# Altium PCB GateWay V1.2.PcbDoc (part 3 of 3)
Units mil, origin at the board's own origin, x right, y up, seen from the top; angles counter-clockwise.
Board outline 3543.31 x 4133.86 mil, 2 copper layers (Top Layer, Bottom Layer); 169 components, 132 nets, 605 pads, 379 vias.
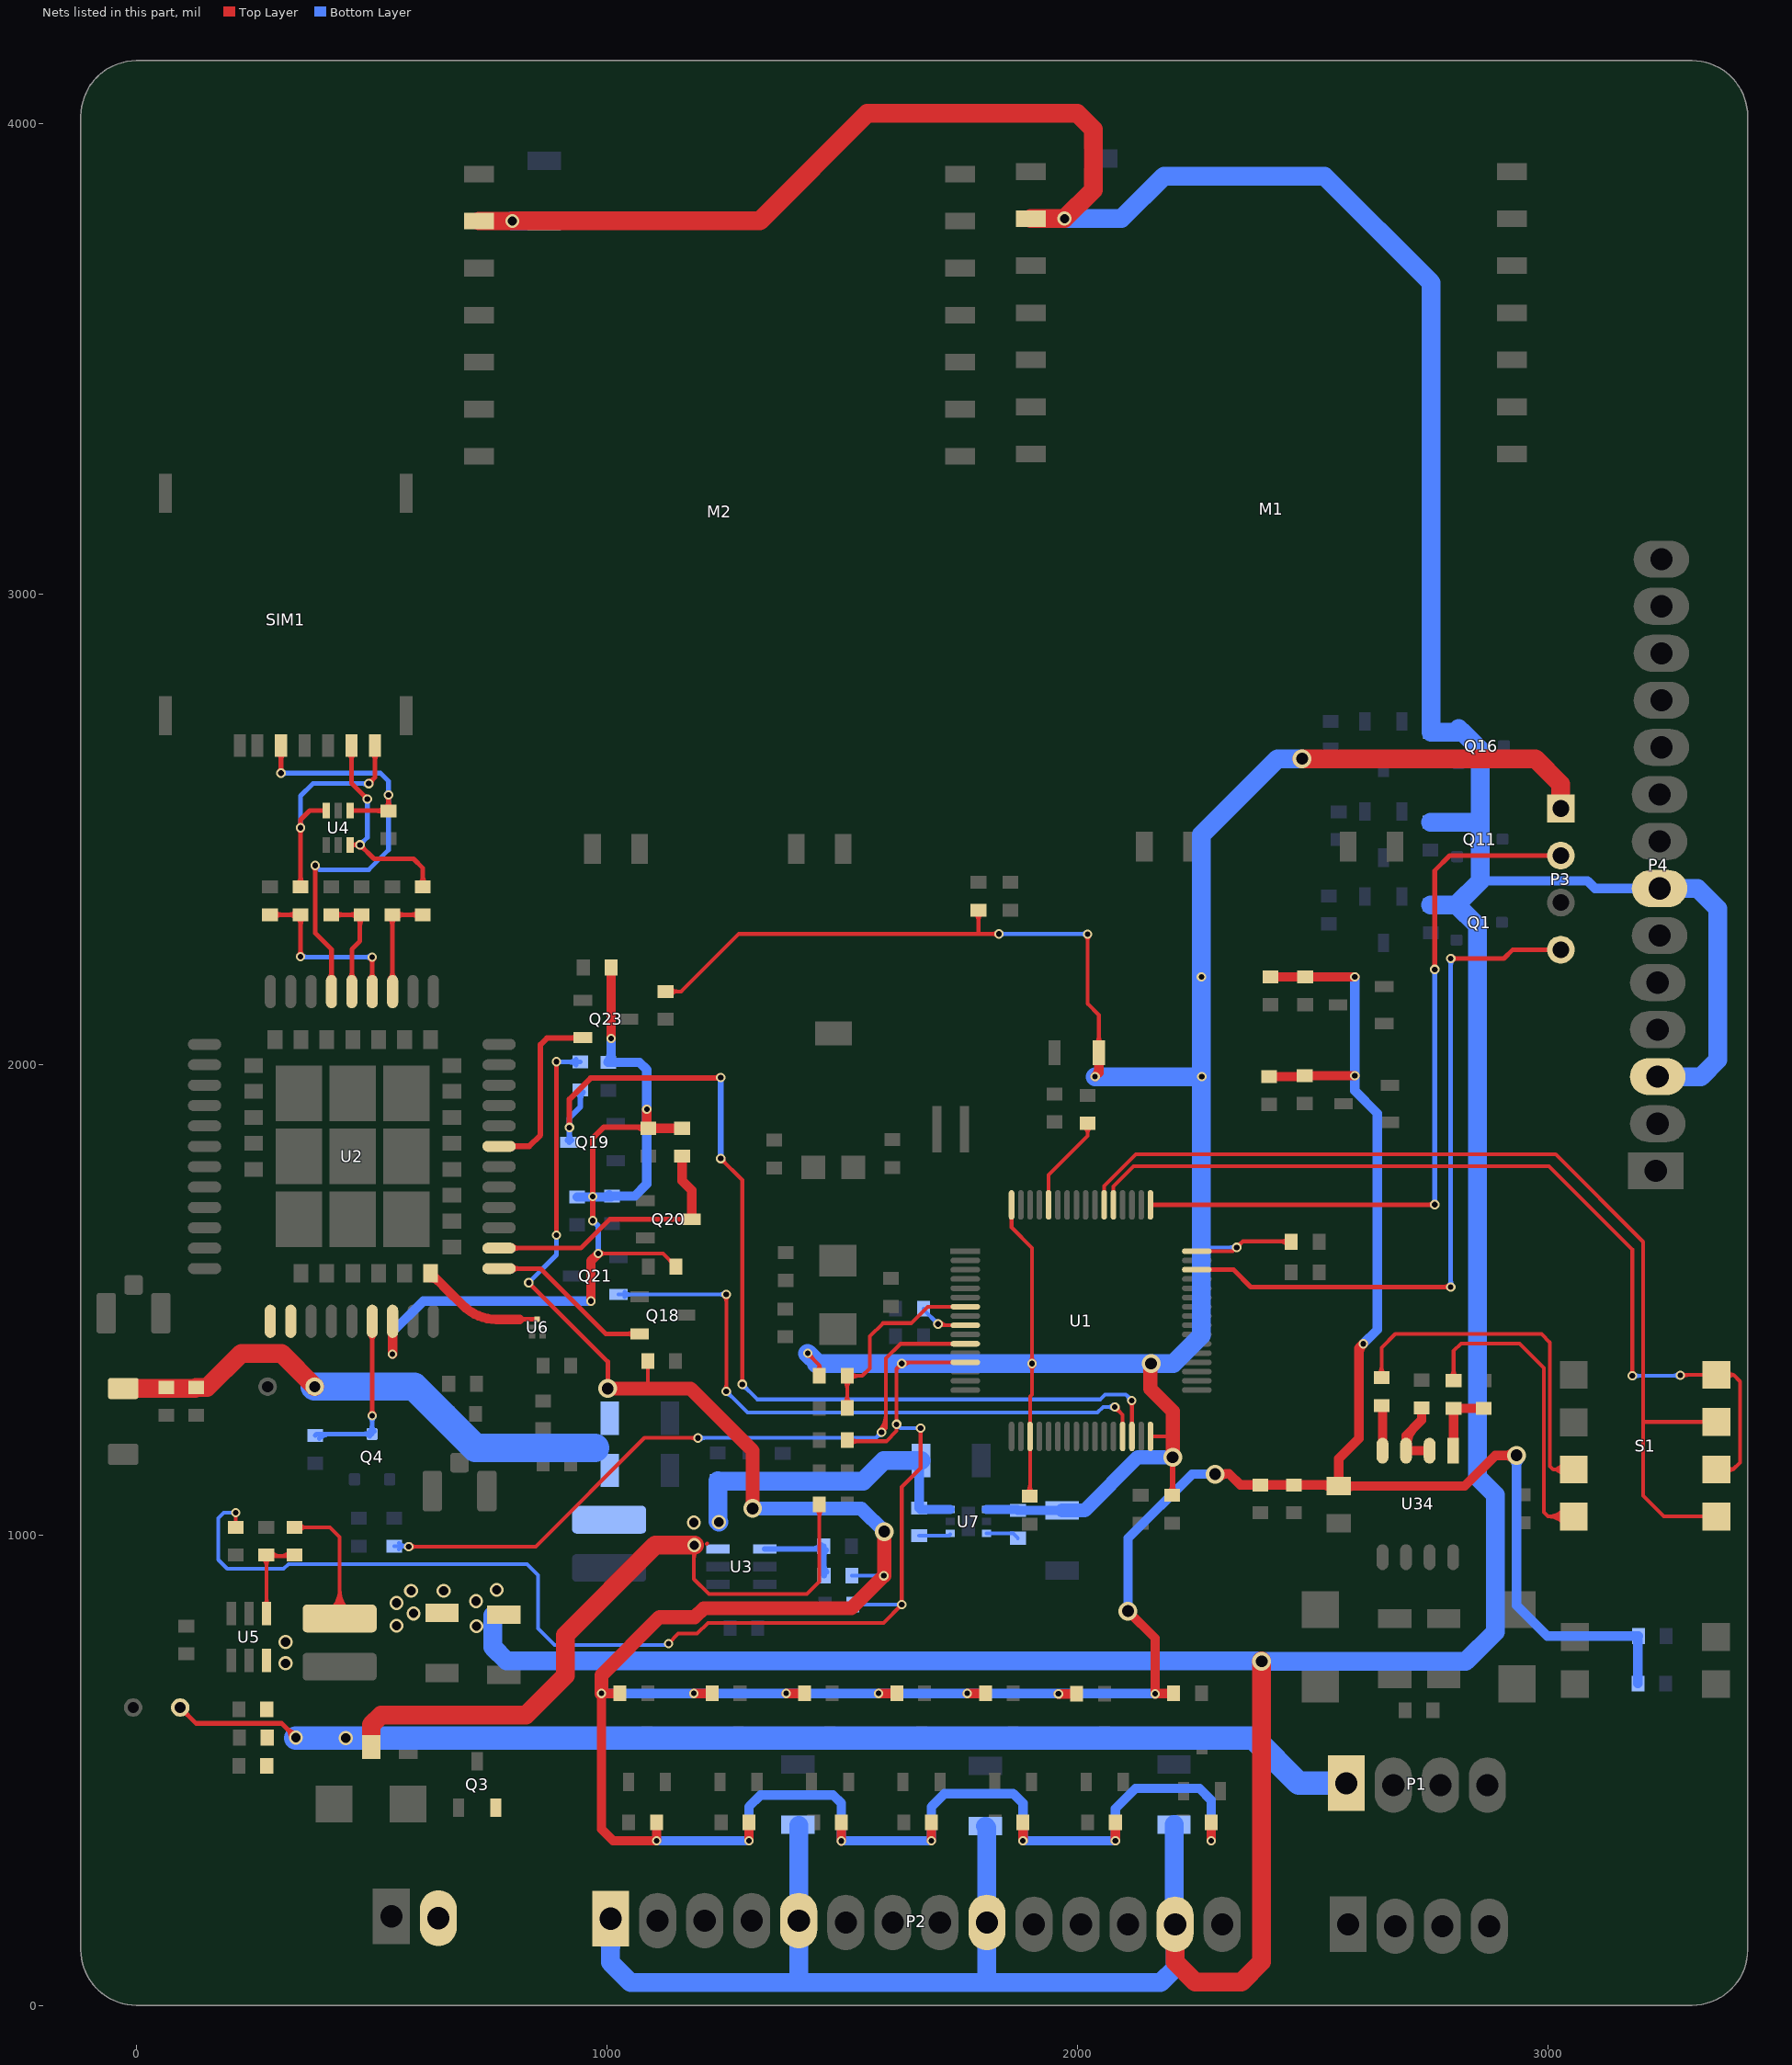
[diagram p3: the nets of this part, all layers, seen from the top]

## Via types
v1: diameter 30, hole 20, Top Layer to Bottom Layer, tented both sides, 218 vias
v2: diameter 20, hole 12, Top Layer to Bottom Layer, tented both sides, 151 vias
v3: diameter 40, hole 25, Top Layer to Bottom Layer, tented both sides, 10 vias

## Nets (pads, with @x,y where several pads share a name; then routed paths per layer and width w, separated by ;. In a path a pad name is that pad's centre, name@x,y a point inside that pad or via, vN(x,y) a via of type N, cw(c..) or ccw(c..) an arc to the next point about the centre after c; other vN are vias at no path point) (continued)
NetR25_2: R25.2 SIM1.7 U4.3 | length 604.2
  Top Layer w10: SIM1.7@451.89,2661.07 cw(c438.58,2647.76) 457.4,2647.76 cw(c476.22,2647.76) SIM1.7@462.91,2661.07 ; U4.3@454.57,2466.77 v2(475.23,2466.77) 505,2437 589,2437 608.98,2417.02 R25.2@608.98,2377.19 ; SIM1.7@457.4,2678 457.4,2597.6 v2(491,2564) ; v2@471.69,2463.24 ccw(c463.16,2454.7) 463.16,2466.77 ccw(c463.16,2478.84) v2@471.69,2470.31 ; v2@475.23,2461.77 cw(c475.23,2449.7) 483.76,2458.24 cw(c492.3,2466.77) v2@480.23,2466.77 ; v2@486,2564 ccw(c473.93,2564) 482.46,2572.54 ccw(c491,2581.07) v2@491,2569 ; R25.2@602.77,2383.4 ccw(c587.78,2398.38) 608.98,2398.38 ccw(c630.17,2398.38) R25.2@615.18,2383.4
  Bottom Layer w10: v2(475.23,2466.77) 491,2482.54 v2(491,2564) ; v2@475.23,2471.77 ccw(c475.23,2483.84) 483.76,2475.31 ccw(c492.3,2466.77) v2@480.23,2466.77 ; v2@487.46,2560.46 cw(c478.93,2551.93) 491,2551.93 cw(c503.07,2551.93) v2@494.54,2560.46
NetR29_2: R29.2 R48.2 U3.4 | length 273.4
  Bottom Layer w12: U3.4@1336,969.8 1454.75,969.8 R48.2@1460.94,976 1460.94,914 R29.2@1461.94,913 ; 1434.33,969.8 ccw(c1434.33,999.66) R48.2@1455.44,978.55 ; R48.2@1455.44,967.55 cw(c1442.16,954.27) 1460.94,954.27 cw(c1479.73,954.27) R48.2@1466.45,967.55 ; R29.2@1456.44,921.45 ccw(c1445.58,932.32) 1460.94,932.32 ; 1460.94,937.15 ccw(c1483.14,937.15) R29.2@1467.45,921.45
NetR35_1: R35.1 U1.60 | length 245
  Top Layer w8: U1.60@1939.17,1701.43 1939.17,1762 1939.17,1765.17 2022,1848 R35.1@2022,1875 ; R35.1@2015.08,1868.08 cw(c1998.39,1851.39) 2022,1851.39 cw(c2045.61,1851.39) R35.1@2028.92,1868.08
NetR39_2: R39.2 SIM1.3 U4.6 | length 674.3
  Top Layer w10: R39.2@342.77,2383.4 ccw(c327.78,2398.38) 348.98,2398.38 ccw(c370.17,2398.38) R39.2@355.18,2383.4 ; v2@345.44,2499.46 cw(c336.9,2490.93) 348.98,2490.93 cw(c361.05,2490.93) v2@352.51,2499.46 ; v2@345.44,2506.54 ccw(c336.9,2515.07) 348.98,2515.07 ccw(c361.05,2515.07) v2@352.51,2506.54 ; R39.2@348.98,2377.19 348.98,2519.98 368.61,2539.61 U4.6@403.39,2539.61 ; v2(494,2597) 507.4,2610.4 SIM1.3@507.4,2678 ; v2@494,2602 ccw(c494,2614.07) 502.54,2605.54 ccw(c511.07,2597) v2@499,2597 ; SIM1.3@501.89,2661.07 cw(c488.58,2647.76) 507.4,2647.76 cw(c526.22,2647.76) SIM1.3@512.91,2661.07
  Bottom Layer w10: v2@345.44,2506.54 ccw(c336.9,2515.07) 348.98,2515.07 ccw(c361.05,2515.07) v2@352.51,2506.54 ; v2@348.98,2502 348.98,2570.98 375,2597 v2(494,2597) ; v2@490.46,2593.46 ccw(c481.93,2584.93) 481.93,2597 ccw(c481.93,2609.07) v2@490.46,2600.54
  other v2: 348.98,2503
NetR50_2: R50.2 R51.2 U5.4 | length 318.5
  Top Layer w8: R51.2@269.08,950.03 cw(c250.45,931.4) 276.8,931.4 ; U5.4@272.56,852.24 ccw(c262.32,862.49) 276.8,862.49 ccw(c291.29,862.49) U5.4@281.05,852.24 ; U5.4@276.8,833 276.8,952.14 274,954.94 334,954.94 R50.2@335,955.94 ; 276.8,935.27 cw(c297.67,935.27) R51.2@282.92,950.03 ; R51.2@285.87,950.03 cw(c297.73,938.16) 297.73,954.94 ; R51.2@285.87,963.86 ccw(c307.39,985.38) 307.39,954.94 ; 304.61,954.94 ccw(c304.61,985.38) R50.2@326.13,963.86 ; 314.27,954.94 cw(c314.27,938.16) R50.2@326.13,950.03
NetR52_2: R52.2 U7.4 | length 67.5
  Bottom Layer w8: R52.2@1664,997.94 1727.17,997.94 U7.4@1730.23,1001
NetR54_1: R54.1 U7.3 | length 71.1
  Bottom Layer w8: U7.3@1807,1002.82 1864.18,1002.82 R54.1@1874,993
NetR55_1: R55.1 U34.4 | length 96.8
  Top Layer w20: R55.1@2647,1275 2649,1273 U34.4@2649,1179
NetR55_2: R55.2 S1.7 | length 886.4
  Top Layer w8: R55.2@2640.08,1340.97 ccw(c2623.39,1357.66) 2647,1357.66 ccw(c2670.61,1357.66) R55.2@2653.92,1340.97 ; R55.2@2647,1334.06 2647,1398 2676,1427 2987,1427 3005,1409 3005,1146 3012,1139 ; S1.7@3033.16,1126.57 ccw(c3012,1114.78) 3012,1139 ; S1.7@3033.16,1151.43 cw(c3012,1163.22) 3012,1139 ; S1.7@3040.15,1130.47 ccw(c3025.62,1122.37) 3025.62,1139 ccw(c3025.62,1155.63) S1.7@3040.15,1147.53 ; S1.7@3055.46,1136 3056,1136 S1.7@3059,1139 ; S1.7@3055.46,1139 3012,1139
NetR58_1: R58.1 U34.2 U34.3 | length 191.6
  Top Layer w20: U34.3@2701.5,1194 cw(c2748.58,1194) 2715.29,1227.29 ; R58.1@2732,1270 2732,1244 2699,1211 U34.3@2699,1179 U34.2@2749,1179
NetR60_2: R60.2 U1.9 | length 145.9
  Top Layer w8: v2(1704.15,1448.15) 1706.78,1445.52 U1.9@1762,1445.52 ; v2@1708.39,1452.39 ccw(c1724.98,1468.98) 1724.98,1445.52
  Bottom Layer w8: R60.2@1673.06,1481 1673.06,1479.24 v2(1704.15,1448.15) ; v2@1698.15,1448.15 ccw(c1683.66,1448.15) 1693.91,1458.39 ccw(c1704.15,1468.63) v2@1704.15,1454.15
NetR137_1: R137.1 R218.1 U34.1 | length 154.4
  Top Layer w20: U34.1@2799,1179 2800,1180 R218.1@2800,1269 R137.1@2864,1269
NetR218_2: R218.2 S1.8 | length 831.9
  Top Layer w8: R218.2@2793.08,1334.97 ccw(c2776.39,1351.66) 2800,1351.66 ccw(c2823.61,1351.66) R218.2@2806.92,1334.97 ; R218.2@2800,1328.06 2800,1391 2816,1407 2940,1407 2992,1355 2992,1048 3001,1039 ; S1.8@3035.83,1022.67 ccw(c3001,993.68) 3001,1039 ; S1.8@3035.83,1055.33 cw(c3001,1084.32) 3001,1039 ; S1.8@3041.98,1027.79 ccw(c3018.07,1007.88) 3018.07,1039 ccw(c3018.07,1070.12) S1.8@3041.98,1050.21 ; S1.8@3059,1039 S1.8@3055.46,1039 3001,1039
NetU2_68: U2.68 U6.1 | length 282
  Top Layer w10: 815,1458 cw(c816.77,1456.23) 816.77,1458.73 U6.1@852.32,1458.73
  Top Layer w20: U2.68@625.31,1546.66 cw(c625.31,1523.28) 641.84,1539.81 ; U2.68@625.31,1556.35 675.65,1506 676,1506 694.71,1487.29 ccw(c765.42,1558) 765.42,1458 815,1458
PWRKEY: Q4.3 R37.1 U2.39 | length 503.2
  Top Layer w10: U2.39@496.47,1425.55 cw(c484.85,1413.92) 501.29,1413.92 cw(c517.73,1413.92) U2.39@506.11,1425.55 ; v2@497.76,1256.83 ccw(c489.22,1265.36) 501.29,1265.36 ccw(c513.36,1265.36) v2@504.83,1256.83 ; v2@501,1253 v2(501.29,1253.29) U2.39@501.29,1453.98
  Bottom Layer w10: R37.1@379.98,1211.19 383.2,1214.42 Q4.3@500.98,1214.42 500.98,1252.98 v2(501.29,1253.29) ; R37.1@389.14,1204.98 cw(c411.92,1182.2) 411.92,1214.42 ; Q4.3@496.16,1209.6 ccw(c484.53,1197.97) 484.53,1214.42 ccw(c484.53,1230.86) Q4.3@496.16,1219.23 ; Q4.3@496.16,1220.22 ccw(c484.53,1231.84) 500.98,1231.84 ccw(c517.42,1231.84) Q4.3@505.79,1220.22 ; v2@497.76,1249.76 cw(c489.98,1241.98) 500.98,1241.98 ; 500.98,1240.46 cw(c514.12,1240.46) v2@504.83,1249.76
RI: Q23.2 U2.7 | length 422.7
  Top Layer w12: U2.7@770.98,1826.03 835.03,1826.03 859,1850 859,2042 873,2056 947.74,2056 Q23.2@949,2057.26 ; U2.7@798.71,1821.92 cw(c808.63,1812) 808.63,1826.03 cw(c808.63,1840.06) U2.7@798.71,1830.14 ; 924.06,2056 ccw(c924.06,2074.33) Q23.2@937.02,2061.37
RS485_RXD1: S1.1 S1.3 U1.54 | length 2172.3
  Top Layer w8: U1.54@2057.28,1701.43 2057.28,1741.28 2125,1809 3017,1809 3203,1623 3203,1241 ; 3258,1240 3269,1240 ; S1.1@3359,1039 3247,1039 3203,1083 3203,1241 ; S1.3@3359,1240 3269,1240 ; 3203,1241 3204,1240 3269,1240
RS485_TXD1: S1.2 S1.4 U1.53 | length 2117
  Top Layer w8: U1.53@2076.96,1701.43 2076.96,1740.96 2120,1784 3003,1784 3180,1607 v2(3180,1338) ; v2@3175.76,1342.24 ccw(c3165.51,1352.49) 3180,1352.49 ccw(c3194.49,1352.49) v2@3184.24,1342.24 ; v2(3282,1339) 3283,1340 S1.4@3359,1340 3395,1340 ; v2@3286.24,1334.76 cw(c3298.9,1322.1) 3298.9,1340 ; v2@3286.24,1343.24 ccw(c3294.07,1351.07) 3294.07,1340 ; S1.2@3359,1139 3394,1139 ; S1.4@3383.09,1331.56 cw(c3395,1327.38) 3395,1340 ; S1.4@3383.09,1348.44 ccw(c3395,1352.62) 3395,1340 ; S1.2@3383.31,1131.2 cw(c3394,1127.77) 3394,1139 ; S1.2@3383.31,1146.8 ccw(c3394,1150.23) 3394,1139 ; 3394,1139 3409,1154 3409,1326 3395,1340
  Bottom Layer w8: v2(3180,1338) 3281,1338 v2(3282,1339) ; v2@3184.24,1333.76 cw(c3194.49,1323.51) 3194.49,1338 cw(c3194.49,1352.49) v2@3184.24,1342.24 ; 3265.1,1338 ccw(c3265.1,1355.9) v2@3277.76,1343.24 ; 3269.93,1338 cw(c3269.93,1326.93) v2@3277.76,1334.76
RST: C13.2 R15.2 U1.7 | length 531.2
  Top Layer w8: C13.2@1504.08,1279.62 ccw(c1487.39,1296.31) 1511,1296.31 ccw(c1534.61,1296.31) C13.2@1517.92,1279.62 ; R15.2@1504.08,1328.13 cw(c1487.39,1311.44) 1511,1311.44 cw(c1534.61,1311.44) R15.2@1517.92,1328.13 ; C13.2@1511,1269.75 R15.2@1511,1338 1543,1338 1559,1354 1559,1422 1587,1450 1647,1450 1681.89,1484.89 U1.7@1762,1484.89 ; R15.2@1517.92,1331.08 cw(c1534.61,1314.39) 1534.61,1338 cw(c1534.61,1361.61) R15.2@1517.92,1344.92
RXD3: Q19.3 R43.1 U1.30 | length 2329.1
  Top Layer w8: v2@1242,1794 cw(c1242,1779.51) 1252.24,1789.76 cw(c1262.49,1800) v2@1248,1800 ; v2(1242,1800) 1288,1754 v2(1288,1320) ; v2@1283.76,1324.24 ccw(c1273.51,1334.49) 1288,1334.49 ccw(c1302.49,1334.49) v2@1292.24,1324.24 ; v2@2111.76,1281.25 cw(c2100.72,1270.21) 2116.33,1270.21 ; U1.30@2116.33,1209.3 v2@2116.33,1288.67 ; 2116.33,1271.8 cw(c2129.69,1271.8) v2@2120.24,1281.25
  Top Layer w12: v2(920.55,1866) 920.55,1925.92 965.63,1971 1241,1971 v2(1242,1972) ; 1229.93,1971 ccw(c1229.93,1984.07) v2@1239.17,1974.83
  Bottom Layer w8: v2@1288,1314 cw(c1288,1299.51) 1298.24,1309.76 cw(c1308.49,1320) v2@1294,1320 ; v2(1288,1320) 1320,1288 2016,1288 ; 2047,1288 2016,1288 ; v2@2110,1285.49 ccw(c2095.51,1285.49) 2105.76,1295.73 ccw(c2116,1305.98) v2@2116,1291.49 ; v2(2116,1285.49) 2103.49,1298 2059,1298 2049,1288 2016,1288
  Bottom Layer w12: Q19.3@916.44,1838.93 ccw(c906.52,1848.85) 920.55,1848.85 ccw(c934.58,1848.85) Q19.3@924.66,1838.93 ; Q19.3@920.55,1834.82 v2(920.55,1866) 920.55,1886.55 943.98,1909.98 R43.1@943.98,1946.19 ; R43.1@938.48,1940.69 cw(c925.19,1927.41) 943.98,1927.41 cw(c962.76,1927.41) R43.1@949.48,1940.69 ; v2(1242,1800) v2(1242,1972)
SIM_CLK: C17.2 R39.1 U2.16 | length 574.7
  Top Layer w10: C17.2@283.98,2318.13 R39.1@348.98,2318.13 v2@348.98,2229.02 ; C17.2@293.14,2311.93 cw(c308.12,2296.94) 308.12,2318.13 cw(c308.12,2339.33) C17.2@293.14,2324.34 ; R39.1@339.82,2311.93 ccw(c324.83,2296.94) 324.83,2318.13 ccw(c324.83,2339.33) R39.1@339.82,2324.34 ; R39.1@342.77,2311.93 cw(c327.78,2296.94) 348.98,2296.94 cw(c370.17,2296.94) R39.1@355.18,2311.93 ; v2@345.46,2232.54 ccw(c336.99,2241.01) 348.98,2241.01 ; 348.98,2241.13 ccw(c361.13,2241.13) v2@352.54,2232.54 ; U2.16@496.47,2183.21 ccw(c484.85,2194.84) 501.29,2194.84 ccw(c517.73,2194.84) U2.16@506.11,2183.21 ; v2@497.46,2224.46 cw(c488.23,2215.23) 501.29,2215.23 ; v2(501,2228) 501.29,2227.71 U2.16@501.29,2154.77 ; 501.29,2216.63 cw(c512.37,2216.63) v2@504.54,2224.46
  Bottom Layer w10: v2(349,2229) 350,2228 v2(501,2228) ; v2@352.54,2232.54 ccw(c363.49,2243.49) 363.49,2228 ; v2@497.46,2224.46 ccw(c488.93,2215.93) 488.93,2228 ccw(c488.93,2240.07) v2@497.46,2231.54
SIM_DATA: C18.2 R25.1 U2.15 | length 354.3
  Top Layer w10: C18.2@537.77,2311.93 cw(c522.78,2296.94) 543.98,2296.94 cw(c565.17,2296.94) C18.2@550.18,2311.93 ; U2.15@539.78,2183.21 ccw(c529.66,2193.33) 543.98,2193.33 ; 543.98,2196.34 ccw(c562.55,2196.34) U2.15@549.42,2183.21 ; U2.15@544.6,2154.77 543.98,2155.39 C18.2@543.98,2318.13 R25.1@608.98,2318.13 ; C18.2@553.14,2311.93 cw(c568.12,2296.94) 568.12,2318.13 cw(c568.12,2339.33) C18.2@553.14,2324.34 ; R25.1@599.82,2311.93 ccw(c584.83,2296.94) 584.83,2318.13 ccw(c584.83,2339.33) R25.1@599.82,2324.34
SIM_PWR: R16.2 U1.11 | length 1686.5
  Top Layer w8: v2(579,975) 849,975 1080,1206 v2(1194,1206) ; v2@583.24,970.76 cw(c593.49,960.51) 593.49,975 cw(c593.49,989.49) v2@583.24,979.24 ; v2@1189.76,1201.76 ccw(c1179.51,1191.51) 1179.51,1206 ccw(c1179.51,1220.49) v2@1189.76,1210.24 ; v2@1579.76,1222.24 ccw(c1547.79,1254.21) 1593,1254.21 ; v2(1584,1218) 1593,1227 1593,1375 1624.15,1406.15 U1.11@1762,1406.15 ; v2@1585.41,1216.59 ccw(c1567.1,1234.9) 1593,1234.9
  Bottom Layer w8: R16.2@547.98,976.13 577.87,976.13 v2(579,975) ; R16.2@557.84,969.22 cw(c574.54,952.52) 574.54,976.13 cw(c574.54,999.74) R16.2@557.84,983.05 ; R16.2@561.78,976.13 cw(c561.78,957.78) v2@574.76,970.76 ; 567.25,976.13 ccw(c567.25,986.75) v2@574.76,979.24 ; v2(1194,1206) 1572,1206 v2(1584,1218) ; v2@1198.24,1201.76 cw(c1208.49,1191.51) 1208.49,1206 cw(c1208.49,1220.49) v2@1198.24,1210.24 ; v2@1578,1218 cw(c1563.51,1218) 1573.76,1207.76 cw(c1584,1197.51) v2@1584,1212
SIM_RST: C16.2 R23.1 U2.17 | length 362.8
  Top Layer w10: R23.1@413.98,2318.13 C16.2@478.98,2318.13 475,2314.16 475,2262 457.98,2244.98 U2.17@457.98,2154.77 ; R23.1@423.14,2311.93 cw(c438.12,2296.94) 438.12,2318.13 cw(c438.12,2339.33) R23.1@423.14,2324.34 ; U2.17@453.17,2183.21 ccw(c441.54,2194.84) 457.98,2194.84 ccw(c474.43,2194.84) U2.17@462.8,2183.21 ; C16.2@469.82,2324.34 cw(c454.83,2339.33) 454.83,2318.13 cw(c454.83,2296.94) 469.82,2311.93 cw(c457.3,2299.41) 475,2299.41 ; 475,2294.47 cw(c499.69,2294.47) C16.2@482.23,2311.93
SIM_RXD: Q20.3 R46.1 U2.2 | length 629.3
  Top Layer w10: U2.2@770.98,1609.5 944.82,1609.5 1006.14,1670.82 Q20.3@1180.4,1670.82 ; U2.2@799.41,1604.68 cw(c811.04,1593.05) 811.04,1609.5 cw(c811.04,1625.94) U2.2@799.41,1614.31 ; Q20.3@1167.71,1666 ccw(c1156.08,1654.38) 1156.08,1670.82 ccw(c1156.08,1687.26) Q20.3@1167.71,1675.64
  Top Layer w20: R46.1@1159.98,1805.19 1159.98,1753.02 1180.4,1732.6 Q20.3@1180.4,1670.82
SIM_TXD: Q18.2 U2.1 | length 408.1
  Top Layer w10: U2.1@770.98,1566.19 858.81,1566.19 997.55,1427.45 Q18.2@1069.98,1427.45 ; U2.1@799.41,1561.37 cw(c811.04,1549.75) 811.04,1566.19 cw(c811.04,1582.63) U2.1@799.41,1571.01 ; Q18.2@1057.29,1422.63 ccw(c1045.66,1411.01) 1045.66,1427.45 ccw(c1045.66,1443.89) Q18.2@1057.29,1432.26
SIM_VDD: C14.2 SIM1.1 U2.18 U4.4 | length 1252
  Top Layer w10: SIM1.1@301.89,2661.07 cw(c288.58,2647.76) 307.4,2647.76 cw(c326.22,2647.76) SIM1.1@312.91,2661.07 ; v2@303.87,2622.94 ccw(c295.33,2631.47) 307.4,2631.47 ccw(c319.47,2631.47) v2@310.94,2622.94 ; v2@307,2619 v2(307.4,2619.4) SIM1.1@307.4,2678 ; v2@376.46,2419.46 cw(c367.93,2410.93) 380,2410.93 cw(c392.07,2410.93) v2@383.54,2419.46 ; v2(380,2423) 380,2279.2 414.68,2244.52 U2.18@414.68,2154.77 ; U2.18@409.86,2183.21 ccw(c398.23,2194.84) 414.68,2194.84 ccw(c431.12,2194.84) U2.18@419.49,2183.21 ; U4.4@454.57,2539.61 535.45,2539.61 C14.2@536,2539.06 v2(536,2573) ; 510.52,2539.61 cw(c510.52,2516.53) C14.2@526.84,2532.85 ; 513.18,2539.61 ccw(c513.18,2558.92) C14.2@526.84,2545.26 ; C14.2@529.79,2545.26 ccw(c514.8,2560.25) 536,2560.25 ccw(c557.2,2560.25) C14.2@542.21,2545.26 ; v2@532.46,2569.46 cw(c523.93,2560.93) 536,2560.93 cw(c548.07,2560.93) v2@539.54,2569.46
  Bottom Layer w10: v2(307.4,2619.4) 518.6,2619.4 536,2602 v2(536,2573) 536,2456 494,2414 389,2414 v2(380,2423) ; v2@310.94,2615.87 cw(c319.47,2607.33) 319.47,2619.4 cw(c319.47,2631.47) v2@310.94,2622.94 ; v2@532.46,2569.46 cw(c523.93,2560.93) 536,2560.93 cw(c548.07,2560.93) v2@539.54,2569.46 ; v2@532.46,2576.54 ccw(c523.93,2585.07) 536,2585.07 ccw(c548.07,2585.07) v2@539.54,2576.54
SWCLK: P3.2 U1.49 | length 1671.6
  Top Layer w10: U1.49@2155.7,1701.43 2759.43,1701.43 v2(2760,1702) ; 2746.54,1701.43 ccw(c2746.54,1715.46) v2@2756.46,1705.54 ; 2749.32,1701.43 cw(c2749.32,1691.32) v2@2756.46,1698.46 ; v2@2756.46,2205.54 ccw(c2747.93,2214.07) 2760,2214.07 ccw(c2772.07,2214.07) v2@2763.54,2205.54 ; v2(2760,2202) 2760,2412 2792,2444 P3.2@3028,2444
  Bottom Layer w10: v2@2756.46,1705.54 ccw(c2747.93,1714.07) 2760,1714.07 ccw(c2772.07,1714.07) v2@2763.54,1705.54 ; v2@2756.46,2198.46 cw(c2747.93,2189.93) 2760,2189.93 cw(c2772.07,2189.93) v2@2763.54,2198.46 ; v2(2760,1702) v2(2760,2202)
SWD: P3.4 U1.46 | length 1570.8
  Top Layer w10: U1.46@2254.13,1563.63 2332.38,1563.63 2369.01,1527 v2(2794,1527) ; v2@2790.46,1523.46 ccw(c2781.93,1514.93) 2781.93,1527 ccw(c2781.93,1539.07) v2@2790.46,1530.54 ; v2(2794,2225) 2907,2225 2926,2244 P3.4@3028,2244 ; v2@2797.54,2221.46 cw(c2806.07,2212.93) 2806.07,2225 cw(c2806.07,2237.07) v2@2797.54,2228.54
  Bottom Layer w10: v2@2790.46,1530.54 ccw(c2781.93,1539.07) 2794,1539.07 ccw(c2806.07,1539.07) v2@2797.54,1530.54 ; v2@2790.46,2221.46 cw(c2781.93,2212.93) 2794,2212.93 cw(c2806.07,2212.93) v2@2797.54,2221.46 ; v2(2794,1527) v2(2794,2225)
TXD3: Q21.2 U1.29 | length 1520.8
  Top Layer w8: v2@1249.71,1309.24 ccw(c1239.46,1319.49) 1253.95,1319.49 ccw(c1268.43,1319.49) v2@1258.19,1309.24 ; v2@1249.71,1506.71 cw(c1239.46,1496.46) 1253.95,1496.46 cw(c1268.43,1496.46) v2@1258.19,1506.71 ; v2(1253.95,1305) v2(1253.95,1510.95) ; v2@2080,1266 cw(c2080,1251.51) 2090.24,1261.76 cw(c2100.49,1272) v2@2086,1272 ; v2(2080,1272) 2096.65,1255.35 U1.29@2096.65,1209.3
  Bottom Layer w8: Q21.2@1024.53,1510.95 v2(1253.95,1510.95) v2@1254,1511 ; Q21.2@1037.92,1505.43 cw(c1051.26,1492.09) 1051.26,1510.95 cw(c1051.26,1529.81) Q21.2@1037.92,1516.47 ; v2@1249.71,1506.71 ccw(c1239.46,1496.46) 1239.46,1510.95 ccw(c1239.46,1525.43) v2@1249.71,1515.19 ; v2@1253.95,1299 cw(c1253.95,1284.51) 1264.19,1294.76 cw(c1274.43,1305) v2@1259.95,1305 ; v2(1253.95,1305) 1298.95,1260 2043,1260 2055,1272 v2(2080,1272) ; v2@2075.76,1267.76 ccw(c2065.51,1257.51) 2065.51,1272 ccw(c2065.51,1286.49) v2@2075.76,1276.24
VCC: C25.2 C26.2 C32.2 C33.2 C34.2 C37.1 C39.1 C41.2 F2.2 P1.1 R14.1 R52.1 U3.3 U5.3 U7.6 | length 4842.9
  Top Layer w8: v1@1178.22,970.22 cw(c1161.86,953.86) 1185,953.86 ; 1185,949.03 cw(c1214.97,949.03) v1@1193.78,970.22 ; v1@1185,978 1185,906 1217,874 1424.94,874 1451.94,901 R14.1@1451.94,1065 ; 1212,981 1213,982 ; R14.1@1445.03,1055.13 cw(c1428.33,1038.44) 1451.94,1038.44 cw(c1475.55,1038.44) R14.1@1458.86,1055.13
  Top Layer w10: C37.1@93,633 126.79,599.21 308.79,599.21 v1(339,569) ; v1@329,569 ccw(c304.86,569) 321.93,586.07 ccw(c339,603.14) v1@339,579
  Top Layer w40: F2.2@499.26,549 499.26,596.26 520,617 828,617 912,701 912,787 1103,978 1185,978 v1(1186,978)
  Bottom Layer w20: C39.1@1668,1158 1664,1154 R52.1@1664,1057 1667,1054 U7.6@1730.23,1054
  Bottom Layer w40: v1(1238,1027) 1236,1029 C26.2@1236,1115 1237,1114 1344,1114 C25.2@1374,1114 1545,1114 1589,1158 C39.1@1668,1158
  Bottom Layer w50: v1@339,568 2375,568 2471,472 P1.1@2572,472
  other v1: 445,568 317,727 317,772 1185,1026
VCC_3.3V: C3.2 C8.2 C11.2 C12.2 C38.1 D2.1 P3.1 R15.1 R49.1 R53.2 R54.2 R62.2 R65.2 U1.13 U1.19 U1.32 U1.48 U1.64 U7.1 | length 9498.2
  Top Layer w8: R53.2@211,1016.06 v2(211,1047) ; R62.2@1125,2155.06 1158.02,2155.06 1280.45,2277.48 1788,2277.48 ; v2(1131,769) 1152,790 1192,790 1215,813 1588,813 v2(1627,852) 1627,1102 1667,1142 v2(1667,1227) ; R62.2@1134.87,2148.14 cw(c1151.56,2131.45) 1151.56,2155.06 cw(c1151.56,2178.66) R62.2@1134.87,2161.97 ; v2@1427,1380 cw(c1427,1365.51) 1437.24,1375.76 cw(c1447.49,1386) v2@1433,1386 ; v2(1427,1386) 1451.94,1361.06 ; R15.1@1445.91,1348.65 ccw(c1436.18,1361.05) 1451.94,1361.05 ; R15.1@1451.94,1338 1451.94,1361.06 ; R15.1@1457.98,1348.65 cw(c1467.71,1361.05) 1451.94,1361.05 ; C8.2@1511,1201.5 1513.5,1199 1594,1199 1616,1221 v2(1616,1235) 1616,1353 v2(1627,1364) ; C8.2@1517.92,1191.63 cw(c1535.7,1173.84) 1535.7,1199 ; C8.2@1517.92,1205.46 ccw(c1533.52,1221.06) 1533.52,1199 ; v2@1621,1364 cw(c1606.51,1364) 1616.76,1353.76 cw(c1627,1343.51) v2@1627,1358 ; v2@1631.24,1359.76 cw(c1648.2,1342.8) 1648.2,1366.78 ; v2@1631.78,1366.78 U1.13@1762,1366.78 ; R65.2@1783.08,2321.03 cw(c1766.39,2304.34) 1790,2304.34 cw(c1813.61,2304.34) R65.2@1796.92,2321.03 ; R65.2@1790,2327.94 1790,2279.48 1788,2277.48 ; v2@1829.28,2273.24 ccw(c1819.03,2263) 1819.03,2277.48 ccw(c1819.03,2291.97) v2@1829.28,2281.72 ; v2@1834,2277 v2(1833.52,2277.48) 1788,2277.48 ; U1.64@1860.43,1701.43 1860.43,1653.57 1904,1610 v2(1904,1364) 1904,1298.2 1899.8,1294 U1.19@1899.8,1209.3 1899.8,1082.85 C3.2@1899,1082.06 ; C3.2@1892.08,1088.97 ccw(c1873.47,1107.58) 1899.8,1107.58 ; v2@1899.76,1359.76 cw(c1889.51,1349.51) 1904,1349.51 cw(c1918.49,1349.51) v2@1908.24,1359.76 ; v2@1899.76,1368.24 ccw(c1889.51,1378.49) 1904,1378.49 ccw(c1918.49,1378.49) v2@1908.24,1368.24 ; 1899.8,1103.74 ccw(c1920.69,1103.74) C3.2@1905.92,1088.97 ; v2@2017.76,2272.76 cw(c2007.51,2262.51) 2022,2262.51 cw(c2036.49,2262.51) v2@2026.24,2272.76 ; v2(2022,2277) 2022,2129 2046,2105 D2.1@2046,2025 ; D2.1@2039.78,2045 ccw(c2024.77,2060.01) 2046,2060.01 ccw(c2067.23,2060.01) D2.1@2052.22,2045 ; U1.32@2155.7,1209.3 2202.7,1209.3 2203,1209 ; U1.48@2254.13,1603 2331,1603 ; v2(2339.08,1611.08) 2352,1624 2453.94,1624 C12.2@2454.94,1623 ; v2@2339.08,1617.08 ccw(c2339.08,1631.56) 2349.32,1621.32 ccw(c2359.56,1611.08) v2@2345.08,1611.08 ; 2428.92,1624 cw(c2428.92,1596.98) C12.2@2448.03,1616.08 ; 2433.75,1624 ccw(c2433.75,1644.2) C12.2@2448.03,1629.92
  Top Layer w12: v3@2155.7,1351.21 cw(c2169.79,1351.21) v3@2159.83,1361.17 ; C11.2@2196.5,1089.56 ccw(c2180.8,1105.25) 2203,1105.25 ; C11.2@2202,1084.06 2203,1085.06 v3(2203,1165) ; 2203,1100.42 ccw(c2218.37,1100.42) C11.2@2207.5,1089.56
  Top Layer w20: v2(2038,1974.06) ccw(c2018.69,1993.37) 2046,1993.37 ; 2046,1982.06 D2.1@2046,2025
  Top Layer w30: v3@2155.7,1363.7 2155.7,1310.3 2203,1263 2203,1209 v3(2203,1165)
  Top Layer w40: v3(2478,2650) 2974,2650 3028,2596 P3.1@3028,2544
  Bottom Layer w8: v2(211,1047) 185.51,1047 174,1035.49 174,947 193,928 313.06,928 323.06,938 830,938 854,914 854,801 889,766 1128,766 v2(1131,769) ; R49.1@1523,852 v2(1627,852) ; v2(1616,1235) 1624,1227 v2(1667,1227) ; v2(1833.52,2277.48) 2021.52,2277.48 v2(2022,2277) ; v2@1837.76,2273.24 cw(c1848,2263) 1848,2277.48 cw(c1848,2291.97) v2@1837.76,2281.72 ; 2006.35,2277.48 cw(c2006.35,2261.35) v2@2017.76,2272.76 ; 2008.67,2277.48 ccw(c2008.67,2290.32) v2@2017.76,2281.24 ; 2266.92,1611.08 v2(2339.08,1611.08) ; v2@2334.83,1606.83 ccw(c2324.59,1596.59) 2324.59,1611.08 ccw(c2324.59,1625.56) v2@2334.83,1615.32
  Bottom Layer w20: U7.1@1807,1054 1872.06,1054 R54.2@1874,1052.06 1967.94,1052.06 C38.1@1968,1052 ; 2137,1165 v3(2203,1165)
  Bottom Layer w30: C38.1@1968,1052 2016,1052 2129,1165 v3(2203,1165)
  Bottom Layer w40: v2(1427,1386) 1449,1364 ; 1445,1364 1449,1364 ; v2(2038,1974.06) v2@2264,1974.06 ; v3(2478,2650) 2426,2650 2264,2488 v2@2264,1974.06 ; 1449,1364 v2(1627,1364) v2(1904,1364) v3(2157,1364) 2204,1364 2264,1424 v2@2264,1974.06
  other v2: 2264.94,1974.06 2264.06,2186.06
VCC_3.3V_S: C6.1 C9.2 C24.2 C27.1 C28.1 C89.2 C90.2 D3.2 FB6.2 L2.2 R1.2 R2.2 R4.2 R5.2 R6.2 R7.2 R9.2 R10.2 R13.2 R19.2 R20.2 R21.2 R22.2 R24.2 R26.2 R27.2 R28.2 R29.1 R36.2 R42.2 R43.2 R56.2 R57.2 U2.34 U2.35 | length 11261.3
  Top Layer w8: R42.2@1086.92,1369.19 1086.92,1313.08 1089,1311
  Top Layer w10: v2(834,1536) 1002,1368 v3(1002,1311) ; v2(893,1637) v2(893,2006)
  Top Layer w20: R7.2@1027.94,663 v2(988.61,663) 988.61,374.39 1013.33,349.67 v2(1105.67,349.67) R24.2@1105.67,389 ; v2(1185.17,663) R19.2@1224.11,663 ; v2(1302.17,349.67) R1.2@1302.17,389 ; v2(1381.33,663) R26.2@1420.28,663 ; v2(1498.67,349.33) R2.2@1498.67,389 ; v2(1577.5,663) R36.2@1616.44,663 ; v2(1690.17,349.67) R4.2@1690.17,389 ; v2(1766,663) R9.2@1804.94,663 ; v2(1884.67,349.67) R5.2@1884.67,389 ; v2(1960,662) R10.2@1998.94,662 ; v2(2081.17,349.67) R6.2@2081.17,389 ; v3(2108,838) 2165.61,780.39 v2(2165.61,662) ; v2@2166,663 R27.2@2204.94,663 ; v2(2284.67,349.67) R20.2@2284.67,389 ; v3@2300.07,1121.93 cw(c2319.56,1102.44) 2319.56,1130 ; 2323,1130 2346.94,1106.06 C89.2@2389,1106.06 C90.2@2461,1106.06 2553.69,1106.06 FB6.2@2556,1103.74 ; R21.2@2407.68,1974.06 2481.68,1974.06 R28.2@2483.68,1976.06 v2(2589.94,1976.06) ; R13.2@2410.68,2186.06 R22.2@2484.68,2186.06 v2(2589.94,2186.06) ; 2466.78,1974.06 ccw(c2466.78,1990.01) R28.2@2478.06,1978.73 ; 2521.12,1106.06 cw(c2521.12,1074.77) FB6.2@2543.25,1096.89 ; FB6.2@2549.15,1110.59 ccw(c2532.62,1127.12) 2556,1127.12 ccw(c2579.38,1127.12) FB6.2@2562.85,1110.59 ; FB6.2@2568.75,1096.89 cw(c2585.29,1080.36) 2585.29,1103.74 cw(c2585.29,1127.12) FB6.2@2568.75,1110.59 ; 2599,1384.27 cw(c2629.73,1384.27) v2(2608,1406) 2599,1397 2599,1205 2556,1162 FB6.2@2556,1103.74 ; v3@2926.93,1161.93 ccw(c2909.86,1144.86) 2909.86,1169 ccw(c2909.86,1193.14) v3@2926.93,1176.07 ; v3(2934,1169) 2889,1169 2823.74,1103.74 FB6.2@2556,1103.74
  Top Layer w30: v2(988.61,663) 988.61,701.61 1112,825 1187,825 1206,844 1520,844 v2(1589,913) ; v3(1002,1311) 1089,1311 1178,1311 1310,1179 v3(1310,1056) ; v2@1590,913 v3(1590,1007)
  Top Layer w40: D3.2@-28.02,1311.19 124.92,1311.19 C9.2@126.98,1313.24 150.24,1313.24 223,1386 308.16,1386 C6.1@378.98,1315.19
  Bottom Layer w8: R29.1@1521,913 v2(1589,913)
  Bottom Layer w10: v2(834,1536) 893,1595 v2(893,1637) ; v2@893.76,2005.24 R43.2@943.98,2005.24 ; R43.2@934.82,1999.04 ccw(c919.83,1984.05) 919.83,2005.24 ccw(c919.83,2026.44) R43.2@934.82,2011.45
  Bottom Layer w20: v2(988.61,663) v2(1185.17,663) v2(1381.33,663) v2(1577.5,663) v2(1766,663) v2@2163,663 ; v2(1105.67,349.67) v2(1302.17,349.67) 1302.17,422.17 1327,447 1481,447 1498.67,429.33 1498.67,349.67 v2(1690.17,349.67) 1690.17,422.17 1718,450 1864,450 1884.67,429.33 v2(1884.67,349.67) v2(2081.17,349.67) 2081.17,418.17 2124,461 2260,461 2284.67,436.33 v2(2284.67,349.67) ; v3(2108,838) 2108,993 2244,1129 v3(2293,1129) ; v2(2589.94,2186.06) v2(2589.94,1976.06) 2589.94,1944.06 2638,1896 2638,1436 v2(2608,1406) ; v3@2926.93,1161.93 cw(c2909.86,1144.86) 2934,1144.86 cw(c2958.14,1144.86) v3@2941.07,1161.93 ; v3(2934,1169) 2934,850 2999,785 R56.2@3192.94,785 3191.94,784 R57.2@3191.94,684
  Bottom Layer w30: v3(1310,1056) 1541,1056 v3(1590,1007)
  Bottom Layer w40: C6.1@370,1324.17 C6.1@378.98,1315.19
  Bottom Layer w60: C6.1@378.98,1315.19 590.35,1315.19 720.54,1185 975,1185
VCC_5V: C4.1 C5.1 C21.1 C22.1 C30.1 C31.1 C40.1 L1.2 M1.6 M2.6 P2.1 P2.5 P2.9 P2.13 P4.3 P4.7 Q1.2 Q11.2 Q16.2 R11.2 R30.2 R31.2 R50.1 | length 13139.4
  Top Layer w8: R50.1@336,1016 411,1016 432,995 L1.2@432,822.18 ; R50.1@345.87,1009.08 cw(c362.56,992.39) 362.56,1016 cw(c362.56,1039.61) R50.1@345.87,1022.92 ; L1.2@413.95,840.23 ccw(c370.37,883.81) 432,883.81 ccw(c493.63,883.81) L1.2@450.05,840.23 ; L1.2@419.61,834.57 ccw(c389.68,864.5) 432,864.5 ccw(c474.31,864.5) L1.2@444.39,834.57
  Top Layer w40: M2.6@728.25,3792.9 798.9,3792.9 v1(799,3793) 1325,3793 1554,4022 2000,4022 2034,3988 2034,3859 v1(1973,3798) 1972.9,3797.9 M1.6@1901.25,3797.9 ; P2.13@2208,172.19 2208,92 2251,49 2349,49 2392,92 v3(2392,731) v3@2392,732
  Bottom Layer w20: 2855,2396 2857,2394 2861,2390 3085,2390 3101,2374 P4.7@3237.87,2374
  Bottom Layer w40: 758,829 758,761 787,732 2023,732 ; v1(799,3793) C22.1@867,3793 ; P2.1@994.3,150.62 cw(c961.24,117.55) 1008,117.55 cw(c1054.76,117.55) P2.1@1021.7,150.62 ; P2.1@1008,184 1008,91 1051,48 1359,48 ; 1408,58 P2.5@1408,180.06 C4.1@1408,382 ; 1418,48 1359,48 ; C40.1@1805,381 1808,378 P2.9@1808,176.13 1808,52 1804,48 ; v1(1973,3798) C21.1@2050,3798 2094,3798 2184.23,3888.23 2230,3888.23 ; 2126,732 2023,732 ; P2.13@2205.93,174.26 C5.1@2205.93,384 ; 2208,81 P2.13@2208,172.19 ; 2209,80 2177,48 1804,48 ; 2333,3888.23 2230,3888.23 ; R11.2@2751,2515.06 2850.25,2515.06 2851.6,2516.4 2857,2511 ; R31.2@2751.54,2339.06 2805.96,2339.06 Q1.2@2806.31,2339.4 ; Q16.2@2810.77,2714.4 Q16.2@2802.43,2706.06 ; P4.3@3233.94,1974 3326,1974 3362,2010 3362,2331 3319,2374 P4.7@3237.87,2374 ; 1359,48 1804,48 ; 2023,732 2391,732 v3(2392,731) 2826,731 2889,794 2889,1085 2851,1123 2851,2294.71 Q1.2@2806.31,2339.4 ; 2230,3888.23 2525.77,3888.23 2752,3662 R30.2@2752,2706.06 Q16.2@2802.43,2706.06 ; Q16.2@2802.43,2706.06 2819.94,2706.06 2857,2669 2857,2511 ; Q1.2@2806.31,2339.4 2857,2390.09 2857,2394 2857,2511
  other v1: 723,806 553,807 589,833 553,855 722,859 584,881 653,881 766,883
VCC_IN: P6.2 Q3.2
VDD_EXT: R40.2 R41.2 R44.2 R45.2 R46.2 R47.2 R61.2 U2.40 | length 2108.1
  Top Layer w8: v2(982,1598) 1119.22,1598 R40.2@1147.03,1570.19 ; v2@986.24,1593.76 cw(c996.49,1583.51) 996.49,1598 cw(c996.49,1612.49) v2@986.24,1602.24
  Top Layer w12: v2(970,1668) v2(970,1719) 970,1843 994,1867 1085.22,1867 R44.2@1087.98,1864.24 ; 1059.59,1867 cw(c1059.59,1838.81) R44.2@1079.52,1858.74
  Top Layer w20: v2(544,1384) 544.6,1384.6 U2.40@544.6,1453.98 ; v2(966,1497) 966,1582 v2(982,1598) ; v2(1009.06,2055.06) v2(1009.06,2055.06) R61.2@1009.06,2206 ; v2(1085,1905) 1085,1867.22 R44.2@1085.22,1867 ; R44.2@1087.98,1864.24 R46.2@1159.98,1864.24
  Bottom Layer w12: v2(970,1668) 982,1656 v2(982,1598)
  Bottom Layer w20: v2(544,1384) 544,1431 610,1497 v2(966,1497) ; R47.2@936.98,1718.24 1008.98,1718.24 R45.2@1010.98,1720.24 1059.24,1720.24 1085,1746 v2(1085,1905) 1085,1989 1069.76,2004.24 R41.2@1002.98,2004.24 1009.06,2010.32 v2(1009.06,2055.06) ; 994.07,1718.24 ccw(c994.07,1734.2) R45.2@1005.35,1722.92 ; R41.2@1003.26,2006.92 ccw(c989.26,2020.92) 1009.06,2020.92
pads on no net: M1.8 M1.9 M1.10 M1.11 M1.12 M1.13 M1.14 M1.18 M2.8 M2.9 M2.10 M2.11 M2.12 M2.13 M2.14 M2.18 P4.13 P5.4 SIM1.6 SIM1.8 U1.2 U1.8 U1.22 U1.44 U1.45 U1.50 U1.51 U2.3 U2.4 U2.5 U2.9 U2.10 U2.11 U2.12 U2.14 U2.20 U2.22 U2.23 U2.24 U2.25 U2.26 U2.28 U2.29 U2.38 U2.42 U2.43 U2.44 U2.46 U2.47 U2.48 U2.49 U2.50 U2.51 U2.52 U2.53 U2.54 U2.55 U2.56 U2.57 U2.58 U2.59 U2.60 U2.64 U2.65 U4.1 U7.2 Y5.3

## Polygon pours and split planes (outlines as drawn)
AGND on Top Layer "Top Layer-No Net" (solid, remove dead copper, pour order 1000): -169.49,4118.76 -159.49,4128.76 3816.51,4128.76 3816.51,-787.24 3834.51,-805.24 -399.49,-805.24 -399.49,3796.76 -49.49,4146.76
AGND on Bottom Layer "Top Layer-No Net" (solid, remove dead copper, pour order 1001): -513.69,4377.38 -498.69,4392.38 3662.31,4392.38 3662.31,-370.62 3548.31,-484.62 3391.31,-327.62 -484.69,-327.62 -484.69,459.38 -470.69,473.38 -355.69,588.38 -355.69,4435.38

## Keep-outs
Keep-Out Layer:
  circle w2.5: c0,4133.86 r1.25
  circle w2.5: c-118.11,3499.67 r1.25
  circle w2.5: c275.59,3740.16 r1.25
  circle w2.5: c3289.93,3987.6 r1.25
  lines w5: -118.11,3479.99 -118.11,3663.26 ; -118.11,118.11 ccw(c0,118.11) 0,0 ; -118.11,118.11 ccw(c0,118.11) 0,0 ; -118.11,118.11 -118.11,393.7 275.59,393.7 275.59,0 0,0 ; -118.11,118.11 -118.11,4015.75 ; -118.11,4015.75 cw(c0,4015.75) 0,4133.86 ; -118.11,4015.75 cw(c0,4015.75) 0,4133.86 ; -118.11,4015.75 -118.11,3740.16 275.59,3740.16 275.59,4133.86 0,4133.86 ; 0,0 3307.09,0 ; 0,4133.86 3307.09,4133.86 ; 3307.09,0 ccw(c3307.09,118.11) 3425.2,118.11 ; 3307.09,0 ccw(c3307.09,118.11) 3425.2,118.11 ; 3307.09,0 3031.5,0 3031.5,393.7 3425.2,393.7 3425.2,118.11 ; 3307.09,4133.86 cw(c3307.09,4015.75) 3425.2,4015.75 ; 3307.09,4133.86 cw(c3307.09,4015.75) 3425.2,4015.75 ; 3307.09,4133.86 3031.5,4133.86 3031.5,3740.16 3425.2,3740.16 3425.2,4015.75 ; 3425.2,118.11 3425.2,4015.75

## Other copper
Top Layer:
  rectangle net NetD1_2: 536,382 620,582
  rectangle net VCC: 262,520 520,586
  rectangle net VCC: 257,490 319,653
  rectangle net VCC: 266,708 336,789
  rectangle net VCC_5V: 354,788 844,900
  rectangle net VCC: 1170,959 1262,1042
  region net VCC_IN: 676,115 676,116 694,134 694,204 796,306 796,454 740,454 727,441 727,380 592,245 592,125 602,115
  region net NetD1_2: 555,582 736,582 736,491 563,491 546,508 546,573
  region net NetC35_1: 228,760 252,760 252,753 253,752 253,705 259,699 341,699 346,704 346,747 356,757 506,757 514,749 514,685 506,677 235,677 227,685 227,759
  region net VCC_3.3V_S: 273,1495 338,1495 343,1490 343,1407 421,1329 421,1300 406.18,1285.18 349.82,1285.18 338,1297 338,1328 262,1404 262,1484
Bottom Layer:
  rectangle net VCC: 1170,959 1262,1042
  rectangle net VCC_5V: 524,787 803,899
  rectangle net VCC: 290,517 361,785
  region net NetC29_1: 1263,919 1267,923 1267,946 1265,948 1128,948 1109,967 931.6,967 917.6,953 917.6,899.85 928.45,889 1086,889 1116,919
  region net VCC_3.3V_S: 932,1001 1093,1001 1099,1007 1099,1054 1044,1109 1044,1329 1038,1335 1037,1334 969,1334 961,1326 961,1112 920,1071 920,1013

## Silkscreen, mask and mechanical layers (free items; w line width, h text height)
Top Overlay:
  text "3.3V" at 2991,2615 h50
  text "SWCLK" at 2795,2430 h50
  text "GND" at 2855,2325 h50
  text "SWD" at 2855,2237 h50
  text "NBIOT" at 56,1387 h50
  text "GPS" at 494,1074 h50
  text "VBAT" at 621,319 h50
  text "GND" at 479,317 h50
Bottom Overlay:
  rectangle: 3235,968.33 3286,1016.33
  rectangle: 3235,872 3286,920
  rectangle: 3088,968.33 3139,1016.33
  rectangle: 3088,872 3139,920
  rectangle: 3238,1161 3289,1209
  rectangle: 3088,1161 3139,1209
  rectangle: 3239,1064.67 3290,1112.67
  rectangle: 3088,1064.67 3139,1112.67
  rectangle: 3088,1464.67 3139,1512.67
  rectangle: 3239,1464.67 3290,1512.67
  rectangle: 3088,1561 3139,1609
  rectangle: 3238,1561 3289,1609
  rectangle: 3088,1272 3139,1320
  rectangle: 3088,1368.33 3139,1416.33
  rectangle: 3235,1272 3286,1320
  rectangle: 3235,1368.33 3286,1416.33
  lines w5: 3117,1185 3248,1185 ; 3125,1087 3256,1087 ; 3126,1392 3257,1392 ; 3128,1296 3259,1296 ; 3059,853 3059,1222 3309,1222 3309,853 3059,853 ; 3059,1253 3309,1253 3309,1622 3059,1622 3059,1253
  text "GND" at 3161,2864 h50
  text "GND" at 3164,2759 h50
  text "C3O" at 3155.2,2660 h50
  text "GND" at 3155.2,2560 h50
  text "C2O" at 3161,2455 h50
  text "5V" at 3151,2357 h50
  text "C1O" at 3155.2,2257 h50
  text "GND" at 3155.2,2157 h50
  text "C3OUT3" at 3148,2074 h50
  text "5V" at 3141,1963 h50
  text "C3OUT2" at 3144,1861 h50
  text "GND" at 3137,1750 h50
  text "RS485" at 3033,1423 h50
  text "USART" at 3038,1018 h50
  text "VBAT" at 2597,671 h50 r90
  text "GND" at 2890,650 h50 r90
  text "A+" at 2799,643 h50 r90
  text "B-" at 2685.07,638.93 h50 r90
  text "C1OUT2" at 1328,429 h50 r90
  text "GND" at 2030,424 h50 r90
  text "C1OUT1" at 1135,420 h50 r90
  text "C2OUT2" at 1932,420 h50 r90
  text "C2OUT3" at 2127,417 h50 r90
  text "C2OUT1" at 1729,415 h50 r90
  text "C3OUT1" at 2344,415 h50 r90
  text "C1OUT3" at 1528,411.99 h50 r90
  text "GND" at 1611.43,367.35 h50 r90
  text "GND" at 1240,349.67 h50 r90
  text "5V" at 1028,314 h50 r90
  text "5V" at 1424,309 h50 r90
  text "5V" at 2226,307 h50 r90
  text "5V" at 1821,306 h50 r90
  text "TXD" at 2690,103 h50 r90
  text "GND" at 2792,103 h50 r90
  text "RXD" at 2588,98 h50 r90
Mechanical 1:
  circle w5: c78.74,177.17 r68.9
  circle w5: c3228.35,177.17 r68.9
  circle w5: c3228.35,3956.69 r68.9
  circle w5: c78.74,3956.69 r68.9
  lines w5: -118.11,393.7 -118.11,118.11 ; -118.11,3479.99 -118.11,3663.26 ; -118.11,118.11 ccw(c0,118.11) 0,0 3307.09,0 ccw(c3307.09,118.11) 3425.2,118.11 3425.2,4015.75 ccw(c3307.09,4015.75) 3307.09,4133.86 0,4133.86 ccw(c0,4015.75) -118.11,4015.75 -118.11,118.11
Mechanical 7:
  circle w2.5: c3289.93,3987.6 r1.25
  circle w2.5: c275.59,3740.16 r1.25
  circle w2.5: c-118.11,3499.67 r1.25
  circle w2.5: c0,4133.86 r1.25

## Text inside footprints (layer, text, board x,y; h text height)
C6: Top Overlay "+" at 370.98,1255.19 h30
C37: Top Overlay "+" at 85,573 h30
MS621FE: Top Overlay "+" at 1781,1872 h40 r270